# EAGLE board RJ45 Breakout (EAGLE 9.4.2)
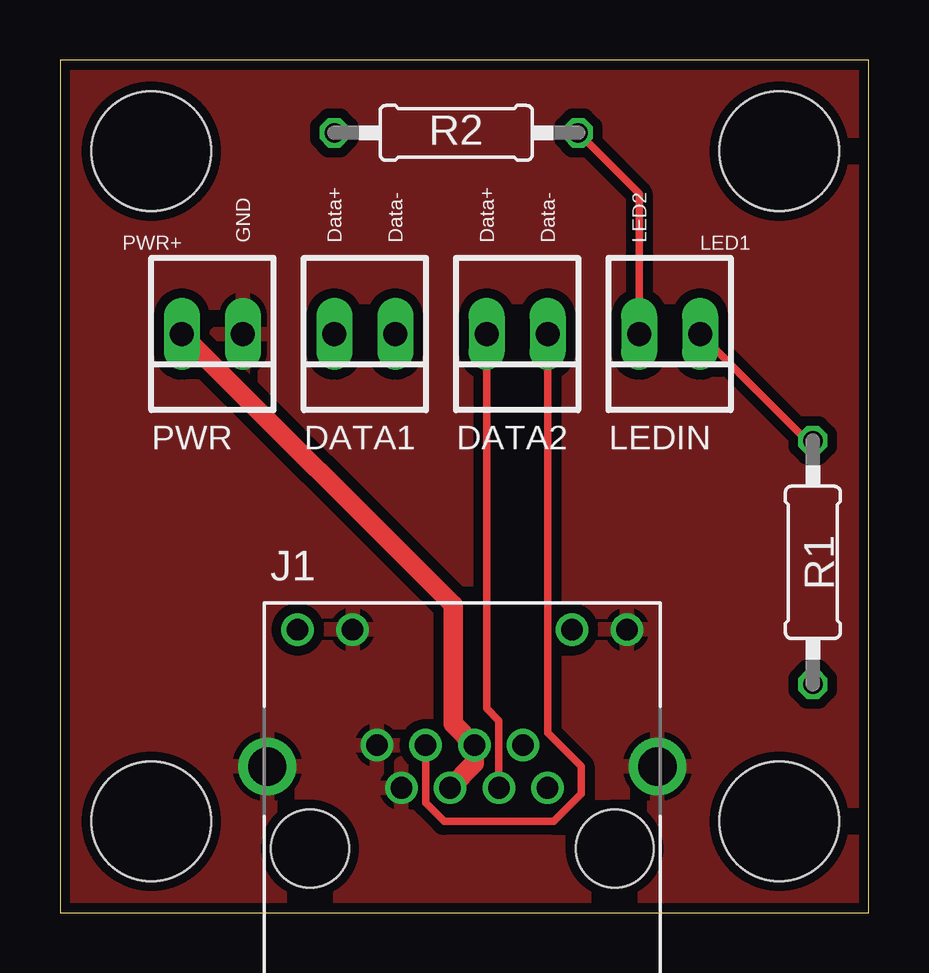
[diagram p0: board, top side]
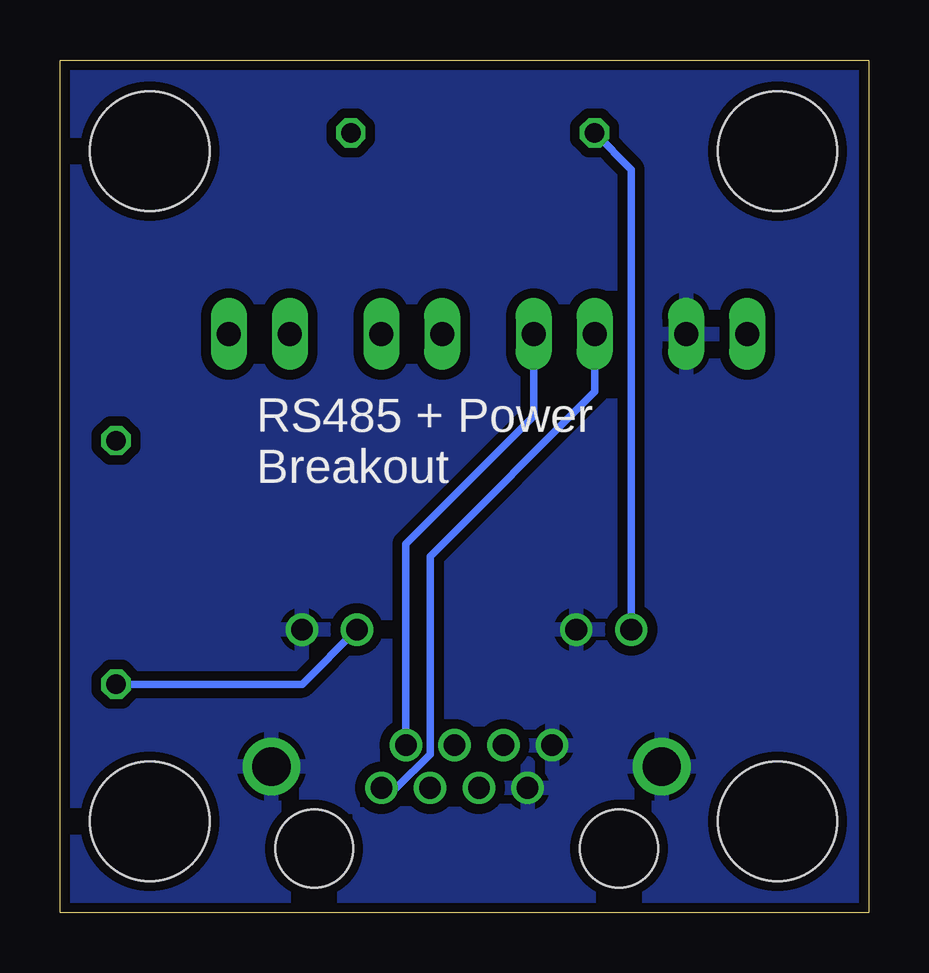
[diagram p1: board, bottom side, seen from below]

Size 33.71 x 35.55 mm. Coordinates in mm from the lower left corner, seen from the top.
Outline: 0,0 33.71,0 33.71,35.55 0,35.55 0,0
Copper layers (1*16): Top 0.035559375mm / dielectric 1.6mm / Bottom 0.035559375mm
Design rules "oshpark-2layer": minimum track width 6mil, minimum drill 10mil, track to track 6mil, track to pad 6mil, pad to pad 6mil, via to via 6mil, smd to smd 6mil, copper to edge 15mil, drill to drill 6mil, minimum pad ring 5mil, minimum via ring 5mil, stop-mask expansion 2.5mil, vias tented up to drill 0mil, thermal gap 10mil
Holes 4.98 mm at 3.81,3.81 29.97,3.81 29.97,31.75 3.81,31.75

## Footprints (pad centres in the part's own frame; a part is rotated, then mirrored left to right if it is on the bottom)
22-23-2021 = drill 1 long: 1 -1.27,0; 2 1.27,0
AMPHENOL_RJHSE-5381 = drill 0.9: 1 3.55,2.54; 2 2.53,4.32; 3 1.52,2.54; 4 0.5,4.32; 5 -0.51,2.54; 6 -1.53,4.32; 7 -2.54,2.54; 8 -3.56,4.32; 9 6.86,9.14; 10 4.57,9.14; 11 -4.57,9.14; 12 -6.86,9.14 | drill 1.6: S1 8.13,3.43; S2 -8.13,3.43 | hole 3.25: 6.35,0; -6.35,0
0207/10 = drill 0.813 octagon: 1 -5.08,0; 2 5.08,0

## Placement (x,y rotation side)
DATA1  22-23-2021  [22-23-2021]  12.7,24.13 180 top
DATA2  22-23-2021  [22-23-2021]  19.05,24.13 180 top
J1  RJHSE-5381  [AMPHENOL_RJHSE-5381]  16.76,2.67 0 top
LEDIN  22-23-2021  [22-23-2021]  25.4,24.13 180 top
PWR  22-23-2021  [22-23-2021]  6.35,24.13 180 top
R1  [0207/10]  31.37,14.61 270 top
R2  [0207/10]  16.51,32.51 180 top

## Library data of the parts
DATA1 DATA2 LEDIN PWR = con-molex; MF: MOLEX; MPN: 22-23-2021; OC_FARNELL: 1462926; OC_NEWARK: 25C3832
J1 = RJHSE-5381; AVAILABILITY: Unavailable; DESCRIPTION: connector, mod jack, rt angle pcb, shielded, led1-g, led2-y, single port, rj-45 8 cont; MF: Amphenol ICC; MP: RJHSE-5381; PACKAGE: None; PRICE: None
R1 R2 = rcl; SPICEPREFIX: R

## Nets
DATA1+: DATA1.2 J1.1
DATA1-: DATA1.1 J1.2
DATA2+: DATA2.2 J1.3
DATA2-: DATA2.1 J1.6
GND: J1.7 J1.8 J1.9 J1.11 J1.S1 J1.S2 PWR.1
LED1: J1.10 R1.2
LED1IN: LEDIN.1 R1.1
LED2: J1.12 R2.2
LED2IN: LEDIN.2 R2.1
VCC: J1.4 J1.5 PWR.2

## Tracks (layer width: path | path; a pad name or v marks a point on that pad's centre or on a via)
DATA1+
  Bottom 0.305: DATA1.2 11.43,21.72 18.29,14.86 18.29,6.61 19.69,5.21 J1.1
DATA1-
  Bottom 0.305: DATA1.1 13.97,20.7 19.29,15.38 J1.2
DATA2+
  Top 0.305: DATA2.2 17.78,8.51 18.29,8 J1.3
DATA2-
  Top 0.305: DATA2.1 20.32,7.49 21.72,6.1 21.72,4.95 20.57,3.81 16,3.81 15.23,4.58 J1.6
GND
  pour Bottom (isolate 0.406): 0,35.56 34.29,35.56 34.29,3.81 35.56,2.54 35.56,0 0,0
  pour Top (isolate 0.406): 0,35.56 34.29,35.56 34.29,0 0,0
LED1
  Bottom 0.305: R1.2 23.62,9.53 J1.10
LED1IN
  Top 0.305: LEDIN.1 31.11,19.68 R1.1
LED2
  Bottom 0.305: J1.12 9.9,30.99 R2.2
LED2IN
  Top 0.305: R2.1 24.13,29.97 LEDIN.2
VCC
  Top 0.813: PWR.2 16.38,12.83 16.38,7.87 J1.4 17.26,6.22 J1.5

## Text on the board
tNames: PWR+ | GND | Data+ | Data- | Data+ | Data- | LED2 | LED1
bNames: RS485 + Power / Breakout